# Altium PCB PCB1.PcbDoc
Units mil, origin at the board's own origin, x right, y up, seen from the top; angles counter-clockwise.
Board outline 6000 x 4000 mil, 2 copper layers (Top Layer, Bottom Layer); 21 components, 20 nets, 386 pads, 0 vias.
Unrouted connection lines stored in the file: 85.
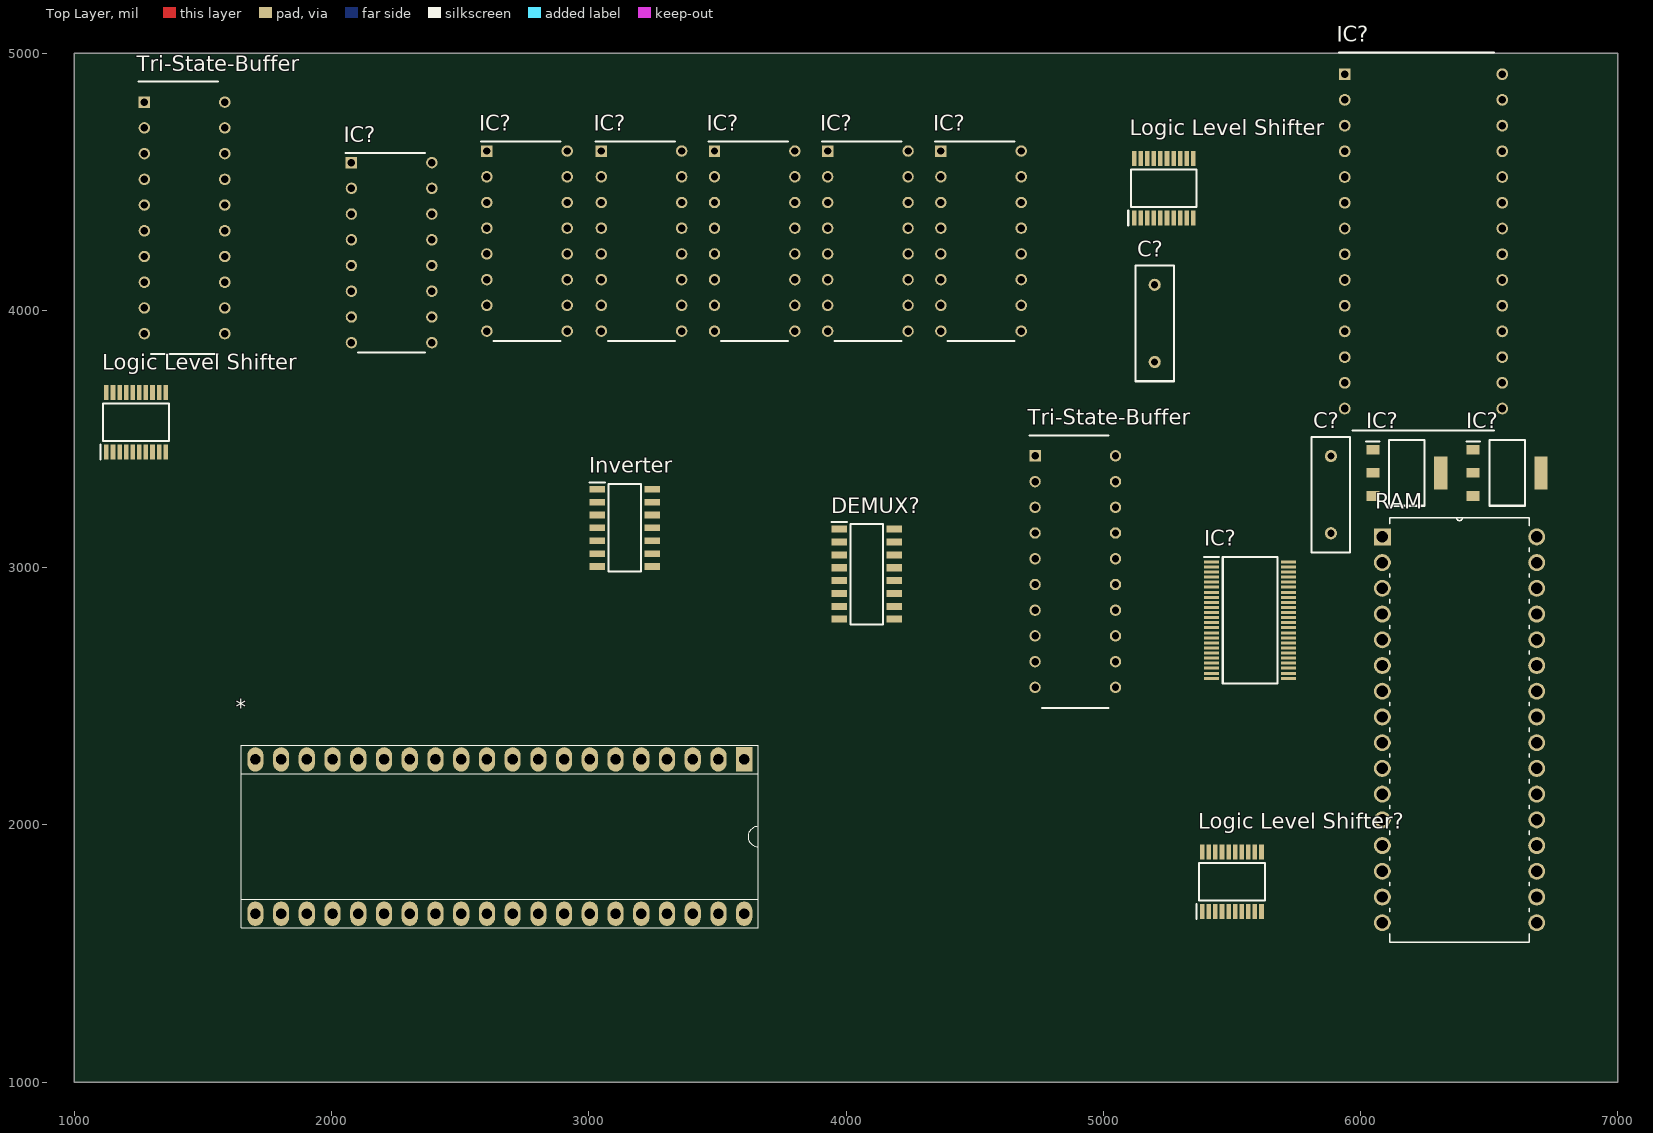
[diagram p0: Top Layer view]
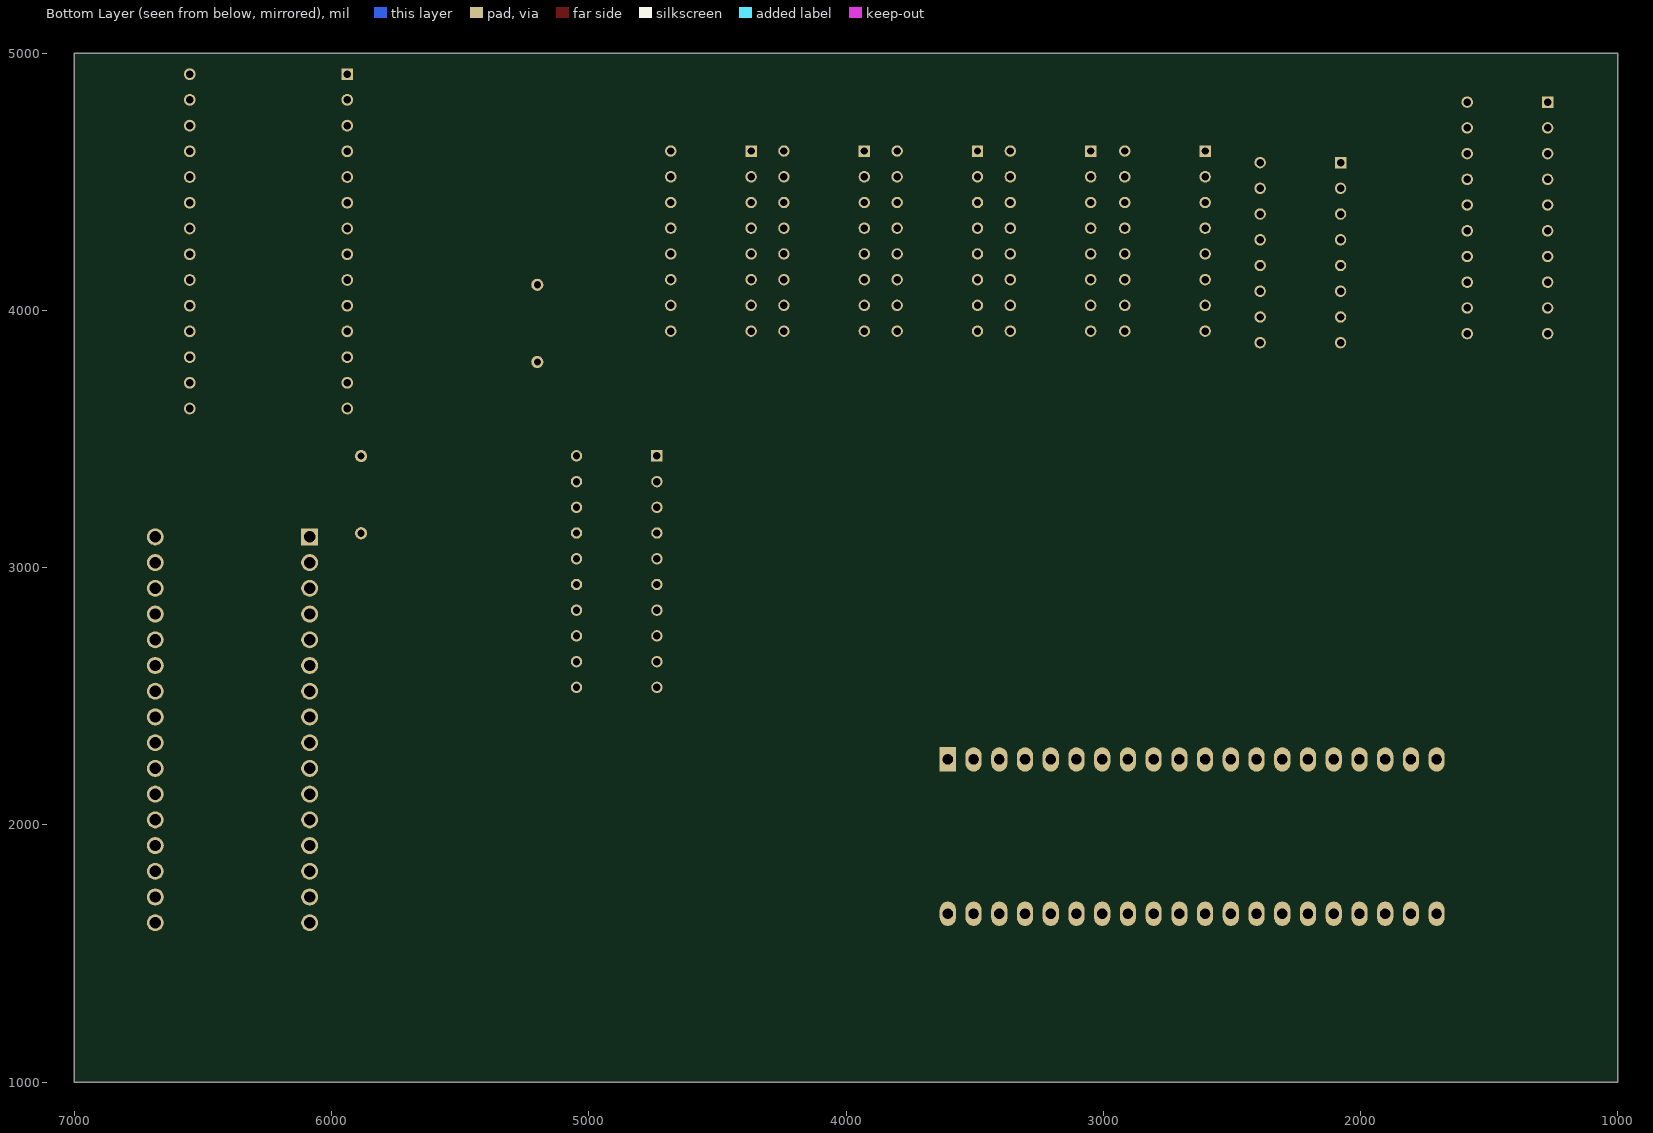
[diagram p1: Bottom Layer view, seen from below]

## Layer stack, top to bottom
Top Solder: solder mask 0.4, Solder Resist, Dk 3.5
Top Layer: signal copper 1.4
Dielectric 1: dielectric 12.6, FR-4, Dk 4.8
Bottom Layer: signal copper 1.4
Bottom Solder: solder mask 0.4, Solder Resist, Dk 3.5

## Board outline
1000,1000 7000,1000 7000,5000 1000,5000

## Design rules (kind name [scope] priority, off if disabled: settings)
Clearance [All] p1: gap=10 ignorepadtopadclearanceinfootprint=FALSE except(0: Arc-Hole Track-Hole SMDPad-Hole THPad-Hole Via-Hole Fill-Hole Poly-Hole Region-Hole Text-Hole)
PolygonConnect [All] p1: connectstyle=Relief reliefconductorwidth=10 reliefentries=4 polygonreliefangle="90 Angle" airgapwidth=10
RoutingVias [All] p1: holewidth=28 width=50 viastyle="Through Hole" minholewidth=28 minwidth=50 maxholewidth=28 maxwidth=50
SolderMaskExpansion [All] p1: expansion=4 istentingtop=FALSE
Width [All] p1: maxlimit=10 minlimit=10 preferedwidth=10
30 further rules are at their usual default settings.

## Classes and differential pairs
component class Sheet1: * C? DEMUX? IC? Inverter "Logic Level Shifter" "Logic Level Shifter?" RAM Tri-State-Buffer

## Components (designator, comment, footprint, x,y, rotation, side; value= is the part's Value field where it differs from the comment)
* "CPU" Processor 2670,1935 r270 top
C? "Cap" RAD-0.3 5200,3950 r90 top value=100pF
C? "Cap" RAD-0.3 5885,3284.06 r90 top value=100pF
DEMUX? "74HC138S16-13" SOIC127P600X175-16N 4080,2975 r0 top
IC? "MC74LCX16244DTG" SOP50P810X110-48N 5570.87,2796.42 r0 top
IC? "SN74LS173" DIP794W53P254L1930H508Q16N 3645,4270 r0 top
IC? "SN74LS173" DIP794W53P254L1930H508Q16N 4525,4270 r0 top
IC? "AT28C64B-15PU" DIP1556W56P254L3702H483Q28N 6245,4268.84 r0 top
IC? "SN74LS173" DIP794W53P254L1930H508Q16N 2233.7,4225 r0 top
IC? "SN74LS173" DIP794W53P254L1930H508Q16N 2760,4270 r0 top
IC? "SN74LS173" DIP794W53P254L1930H508Q16N 3205,4270 r0 top
IC? "AMS1117-3.3" SOT229P700X180-4N 6570,3369.06 r0 top
IC? "SN74LS173" DIP794W53P254L1930H508Q16N 4085,4270 r0 top
IC? "AMS1117-3.3" SOT229P700X180-4N 6180,3369.06 r0 top
Inverter "SN74HC04" SOIC127P600X175-14N 3140,3155 r0 top
"Logic Level Shifter" "TXB0108EPWR" SOP65P640X120-20N 1240,3565 r90 top
"Logic Level Shifter" "TXB0108EPWR" SOP65P640X120-20N 5235,4475 r90 top
"Logic Level Shifter?" "TXB0108EPWR" SOP65P640X120-20N 5500,1780 r90 top
RAM "AS6C1008" DIP254P1524X393-32 6685,1620 r0 top
Tri-State-Buffer "SN74LS245N" DIP794W53P254L2540H508Q20N 4891.3,2985 r0 top
Tri-State-Buffer "SN74LS245N" DIP794W53P254L2540H508Q20N 1428.7,4360 r0 top

## Footprints (in the part's own frame and the unit in brackets; to place one, negate y for a bottom-side part, rotate by r counter-clockwise, add the part's x,y. Pads: shape width x height; smd on the part's side, far side on the other; paste and mask are expansions set on the pad)
DIP254P1524X393-32 [mil]
  rect 66x66 hole 44: 1(-600,1500)
  round 66 hole 44: 2(-600,1400) 3(-600,1300) 4(-600,1200) 5(-600,1100) 6(-600,1000) 7(-600,900) 8(-600,800) 9(-600,700) 10(-600,600) 11(-600,500) 12(-600,400) 13(-600,300) 14(-600,200) 15(-600,100) 16(-600,0) 17(0,0) 18(0,100) 19(0,200) 20(0,300) 21(0,400) 22(0,500) 23(0,600) 24(0,700) 25(0,800) 26(0,900) 27(0,1000) 28(0,1100) 29(0,1200) 30(0,1300) 31(0,1400) 32(0,1500)
  silkscreen extent -572,-75 -28,1575
DIP794W53P254L1930H508Q16N [mm]
  rect 1.13x1.13 hole 0.73: 1(-3.97,8.89)
  round 1.13 hole 0.73: 2(-3.97,6.35) 3(-3.97,3.81) 4(-3.97,1.27) 5(-3.97,-1.27) 6(-3.97,-3.81) 7(-3.97,-6.35) 8(-3.97,-8.89) 9(3.97,-8.89) 10(3.97,-6.35) 11(3.97,-3.81) 12(3.97,-1.27) 13(3.97,1.27) 14(3.97,3.81) 15(3.97,6.35) 16(3.97,8.89)
  silkscreen extent -4.53,-9.84 3.3,9.84, body extent -4.1,-9.65 4.1,9.65, height 5.08
DIP794W53P254L2540H508Q20N [mm]
  rect 1.13x1.13 hole 0.73: 1(-3.97,11.43)
  round 1.13 hole 0.73: 2(-3.97,8.89) 3(-3.97,6.35) 4(-3.97,3.81) 5(-3.97,1.27) 6(-3.97,-1.27) 7(-3.97,-3.81) 8(-3.97,-6.35) 9(-3.97,-8.89) 10(-3.97,-11.43) 11(3.97,-11.43) 12(3.97,-8.89) 13(3.97,-6.35) 14(3.97,-3.81) 15(3.97,-1.27) 16(3.97,1.27) 17(3.97,3.81) 18(3.97,6.35) 19(3.97,8.89) 20(3.97,11.43)
  silkscreen extent -4.53,-13.46 3.3,13.46, body extent -4.1,-12.7 4.1,12.7, height 5.08
DIP1556W56P254L3702H483Q28N [mil]
  rect 45.63x45.63 hole 29.88: 1(-306.26,650)
  round 45.63 hole 29.88: 2(-306.26,550) 3(-306.26,450) 4(-306.26,350) 5(-306.26,250) 6(-306.26,150) 7(-306.26,50) 8(-306.26,-50) 9(-306.26,-150) 10(-306.26,-250) 11(-306.26,-350) 12(-306.26,-450) 13(-306.26,-550) 14(-306.26,-650) 15(306.26,-650) 16(306.26,-550) 17(306.26,-450) 18(306.26,-350) 19(306.26,-250) 20(306.26,-150) 21(306.26,-50) 22(306.26,50) 23(306.26,150) 24(306.26,250) 25(306.26,350) 26(306.26,450) 27(306.26,550) 28(306.26,650)
  silkscreen extent -329,-735 275,735, body extent -312,-729 312,729, height 190
Processor [mm]
  rect 2.4x1.6 hole 1 slot 1.005 at 0 deg: 1(-8.128,23.725)
  oval 2.4x1.6 hole 1 slot 1.005 at 0 deg: 2(-8.128,21.185) 3(-8.128,18.645) 4(-8.128,16.105) 5(-8.128,13.565) 6(-8.128,11.025) 7(-8.128,8.485) 8(-8.128,5.945) 9(-8.128,3.405) 10(-8.128,0.865) 11(-8.128,-1.675) 12(-8.128,-4.215) 13(-8.128,-6.755) 14(-8.128,-9.295) 15(-8.128,-11.835) 16(-8.128,-14.375) 17(-8.128,-16.915) 18(-8.128,-19.455) 19(-8.128,-21.995) 20(-8.128,-24.535) 21(7.112,-24.535) 22(7.112,-21.995) 23(7.112,-19.455) 24(7.112,-16.915) 25(7.112,-14.375) 26(7.112,-11.835) 27(7.112,-9.295) 28(7.112,-6.755) 29(7.112,-4.215) 30(7.112,-1.675) 31(7.112,0.865) 32(7.112,3.405) 33(7.112,5.945) 34(7.112,8.485) 35(7.112,11.025) 36(7.112,13.565) 37(7.112,16.105) 38(7.112,18.645) 39(7.112,21.185) 40(7.112,23.725)
  silkscreen extent -9.52,-25.92 8.5,25.12, body extent -8.12,-26.75 7.37,25.65, height 5
RAD-0.3 [mm] "Radial Cap, Thru-Hole; 2 Leads; 0.3 in Pin Spacing"
  round 1.2 hole 0.7: 1(-3.81,0) 2(3.81,0)
  silkscreen extent -5.71,-1.91 5.71,1.91
SOIC127P600X175-14N [mm]
  rect 1.55x0.65 smd: 1(-2.725,3.81) 2(-2.725,2.54) 3(-2.725,1.27) 4(-2.725,0) 5(-2.725,-1.27) 6(-2.725,-2.54) 7(-2.725,-3.81) 8(2.725,-3.81) 9(2.725,-2.54) 10(2.725,-1.27) 11(2.725,0) 12(2.725,1.27) 13(2.725,2.54) 14(2.725,3.81)
  silkscreen extent -3.5,-4.33 1.6,4.48, body extent -3,-4.33 3,4.33, height 1.75
SOIC127P600X175-16N [mm]
  rect 1.525x0.7 smd: 1(-2.712,4.445) 2(-2.712,3.175) 3(-2.712,1.905) 4(-2.712,0.635) 5(-2.712,-0.635) 6(-2.712,-1.905) 7(-2.712,-3.175) 8(-2.712,-4.445) 9(2.712,-4.445) 10(2.712,-3.175) 11(2.712,-1.905) 12(2.712,-0.635) 13(2.712,0.635) 14(2.712,1.905) 15(2.712,3.175) 16(2.712,4.445)
  silkscreen extent -3.47,-4.95 1.6,5.15, body extent -3,-4.95 3,4.95, height 1.75
SOP50P810X110-48N [mm]
  rect 1.475x0.3 smd: 1(-3.788,5.75) 2(-3.788,5.25) 3(-3.788,4.75) 4(-3.788,4.25) 5(-3.788,3.75) 6(-3.788,3.25) 7(-3.788,2.75) 8(-3.788,2.25) 9(-3.788,1.75) 10(-3.788,1.25) 11(-3.788,0.75) 12(-3.788,0.25) 13(-3.788,-0.25) 14(-3.788,-0.75) 15(-3.788,-1.25) 16(-3.788,-1.75) 17(-3.788,-2.25) 18(-3.788,-2.75) 19(-3.788,-3.25) 20(-3.788,-3.75) 21(-3.788,-4.25) 22(-3.788,-4.75) 23(-3.788,-5.25) 24(-3.788,-5.75) 25(3.788,-5.75) 26(3.788,-5.25) 27(3.788,-4.75) 28(3.788,-4.25) 29(3.788,-3.75) 30(3.788,-3.25) 31(3.788,-2.75) 32(3.788,-2.25) 33(3.788,-1.75) 34(3.788,-1.25) 35(3.788,-0.75) 36(3.788,-0.25) 37(3.788,0.25) 38(3.788,0.75) 39(3.788,1.25) 40(3.788,1.75) 41(3.788,2.25) 42(3.788,2.75) 43(3.788,3.25) 44(3.788,3.75) 45(3.788,4.25) 46(3.788,4.75) 47(3.788,5.25) 48(3.788,5.75)
  silkscreen extent -4.52,-6.25 2.7,6.25, body extent -4.05,-6.25 4.05,6.25, height 1.1
SOP65P640X120-20N [mm]
  rect 1.475x0.45 smd: 1(-2.938,2.925) 2(-2.938,2.275) 3(-2.938,1.625) 4(-2.938,0.975) 5(-2.938,0.325) 6(-2.938,-0.325) 7(-2.938,-0.975) 8(-2.938,-1.625) 9(-2.938,-2.275) 10(-2.938,-2.925) 11(2.938,-2.925) 12(2.938,-2.275) 13(2.938,-1.625) 14(2.938,-0.975) 15(2.938,-0.325) 16(2.938,0.325) 17(2.938,0.975) 18(2.938,1.625) 19(2.938,2.275) 20(2.938,2.925)
  silkscreen extent -3.67,-3.25 1.85,3.5, body extent -3.2,-3.25 3.2,3.25, height 1.2
SOT229P700X180-4N [mm]
  rect 1.3x0.95 smd: 1(-3.35,2.29) 2(-3.35,0) 3(-3.35,-2.29)
  rect 1.3x3.25 smd: 4(3.35,0)
  silkscreen extent -4,-3.25 1.75,3.25, body extent -3.5,-3.25 3.5,3.25, height 1.8

## Part data
C? C?: "Capacitor", LatestRevisionDate=17-Jul-2002, LatestRevisionNote="Re-released for DXP Platform.", PackageDescription="Radial Cap, Thru-Hole; 2 Leads; 0.3 in Pin Spacing", PackageReference=RAD-0.3, Published=8-Jun-2000, Publisher="Altium Limited"
DEMUX?: "Integrated Circuit", Manufacturer_Name="Diodes Inc.", Mouser Part Number=621-74HC138S16-13, Arrow Part Number=74HC138S16-13, Arrow Price/Stock=https://www.arrow.com/en/products/74hc138s16-13/diodes-incorporated, Datasheet Link=https://www.diodes.com/assets/Datasheets/74HC138.pdf, Height=1.75mm, Manufacturer_Part_Number=74HC138S16-13, Mouser Price/Stock=https://www.mouser.com/Search/Refine.aspx?Keyword=621-74HC138S16-13
IC?: "Integrated Circuit", Manufacturer_Name="ON Semiconductor", Mouser Part Number=863-MC74LCX16244DTG, Arrow Part Number=MC74LCX16244DTG, Arrow Price/Stock=https://www.arrow.com/en/products/mc74lcx16244dtg/on-semiconductor, Datasheet Link=http://www.onsemi.com/pub/Collateral/MC74LCX16244-D.PDF, Height=1.1mm, Manufacturer_Part_Number=MC74LCX16244DTG, Mouser Price/Stock=https://www.mouser.com/Search/Refine.aspx?Keyword=863-MC74LCX16244DTG
IC? IC? IC? IC? IC? IC?: library part SN74LS173ANG4, "Integrated Circuit", Manufacturer_Name="Texas Instruments", Datasheet Link=http://www.ti.com/lit/ds/symlink/sn74ls173a.pdf, Height=5.08mm, Manufacturer_Part_Number=SN74LS173ANG4
IC?: "Integrated Circuit", Manufacturer_Name=Microchip, Mouser Part Number=556-AT28C64B15PU, Arrow Part Number=AT28C64B-15PU, Arrow Price/Stock=https://www.arrow.com/en/products/at28c64b-15pu/microchip-technology, Datasheet Link=http://www.atmel.com/images/doc0270.pdf, Height=4.826mm, Manufacturer_Part_Number=AT28C64B-15PU, Mouser Price/Stock=https://www.mouser.co.uk/ProductDetail/Microchip-Technology-Atmel/AT28C64B-15PU/?qs=2VKgqYuc3OvipbcAuBcLow%3D%3D
IC? IC?: "Integrated Circuit", Manufacturer_Name="Advanced Monolithic Systems", Datasheet Link=http://www.advanced-monolithic.com/pdf/ds1117.pdf, Height=1.8mm, Manufacturer_Part_Number=AMS1117-3.3
Inverter: library part SN74HC04D, "Integrated Circuit", Manufacturer_Name="Texas Instruments", Mouser Part Number=595-SN74HC04D, Arrow Part Number=SN74HC04D, Arrow Price/Stock=https://www.arrow.com/en/products/sn74hc04d/texas-instruments, Datasheet Link=http://www.ti.com/lit/ds/symlink/sn74hc04.pdf?HQS=TI-null-null-digikeymode-df-pf-null-wwe&ts=1590985263778, Height=1.75mm, Manufacturer_Part_Number=SN74HC04D, Mouser Price/Stock=https://www.mouser.co.uk/ProductDetail/Texas-Instruments/SN74HC04D/?qs=L5CvrNUdZiq5DddJvhoqZw%3D%3D
"Logic Level Shifter" "Logic Level Shifter" "Logic Level Shifter?": "Integrated Circuit", Manufacturer_Name="Texas Instruments", Datasheet Link=http://www.ti.com/lit/ds/symlink/txb0108.pdf, Height=1.2mm, Manufacturer_Part_Number=TXB0108EPWR
RAM: library part AS6C1008-55PCN, "Integrated Circuit", Manufacturer_Name="Alliance Memory", Mouser Part Number=913-AS6C1008-55PCN, Datasheet Link=http://componentsearchengine.com/Datasheets/1/AS6C1008-55PCN.pdf, Manufacturer_Part_Number=AS6C1008-55PCN, Mouser Price/Stock=https://www.mouser.co.uk/ProductDetail/Alliance-Memory/AS6C1008-55PCN?qs=E5c5%252Bmu3i39qb4Qta5D2qg%3D%3D
Tri-State-Buffer Tri-State-Buffer: "Integrated Circuit", Manufacturer_Name="Texas Instruments", Mouser Part Number=595-SN74LS245N, Arrow Part Number=SN74LS245N, Arrow Price/Stock=https://www.arrow.com/en/products/sn74ls245n/texas-instruments, Datasheet Link=http://componentsearchengine.com/Datasheets/1/SN74LS245N.pdf, Height=5.08mm, Manufacturer_Part_Number=SN74LS245N, Mouser Price/Stock=https://www.mouser.co.uk/ProductDetail/Texas-Instruments/SN74LS245N/?qs=tJ5HNKWh3OU3CUIGSPX6%2Fg%3D%3D

## Nets (pads, with @x,y where several pads share a name; then routed paths per layer and width w, separated by ;. In a path a pad name is that pad's centre, name@x,y a point inside that pad or via, vN(x,y) a via of type N, cw(c..) or ccw(c..) an arc to the next point about the centre after c; other vN are vias at no path point)
+3.3: "Logic Level Shifter.2" "Logic Level Shifter.10" "Logic Level Shifter?.2" "Logic Level Shifter?.10"
+5: "Logic Level Shifter.19" "Logic Level Shifter?.19" DEMUX?.6 DEMUX?.16 IC?.16@2390,4575 IC?.16@2916.3,4620 IC?.16@3361.3,4620 IC?.16@3801.3,4620 IC?.16@4241.3,4620 IC?.16@4681.3,4620 Inverter.14 RAM.31 RAM.32 Tri-State-Buffer.1@4735,3435 Tri-State-Buffer.20
GND: "Logic Level Shifter.11" "Logic Level Shifter?.11" C?.1 DEMUX?.3 DEMUX?.4 DEMUX?.5 DEMUX?.8 IC?.1@2077.4,4575 IC?.1@2603.7,4620 IC?.1@3048.7,4620 IC?.1@3488.7,4620 IC?.1@3928.7,4620 IC?.1@4368.7,4620 IC?.1@6048.11,3459.22 IC?.1@6438.11,3459.22 IC?.2@2077.4,4475 IC?.2@2603.7,4520 IC?.2@3048.7,4520 IC?.2@3488.7,4520 IC?.2@3928.7,4520 IC?.2@4368.7,4520 IC?.4@6311.89,3369.06 IC?.4@6701.89,3369.06 IC?.8@2077.4,3875 IC?.8@2603.7,3920 IC?.8@3048.7,3920 IC?.8@3488.7,3920 IC?.8@3928.7,3920 IC?.8@4368.7,3920 Inverter.7 RAM.16 Tri-State-Buffer.1@1272.4,4810 Tri-State-Buffer.10
NetC?_2: C?.2@5885,3434.06 IC?.2@6438.11,3369.06
NetDEMUX?_13: DEMUX?.13 Inverter.5
NetDEMUX?_14: DEMUX?.14 Inverter.3
NetDEMUX?_15: DEMUX?.15 Inverter.1
NetIC?_4: "Logic Level Shifter.20"@5119.84,4590.67 IC?.4@4368.7,4320
NetIC?_6: "Logic Level Shifter.18"@5171.02,4590.67 IC?.6@4368.7,4120
NetIC?_7: IC?.7@2077.4,3975 IC?.7@2603.7,4020 IC?.7@3048.7,4020 IC?.7@3488.7,4020 IC?.7@3928.7,4020 IC?.7@4368.7,4020 Inverter.10
NetIC?_9: IC?.9@2390,3875 IC?.9@2916.3,3920 IC?.10@2390,3975 IC?.10@2916.3,4020 Inverter.2
NetIC?_11: IC?.11@3361.3,4120 IC?.12@3361.3,4220 IC?.13@3361.3,4320
NetIC?_15: IC?.15@2390,4475 IC?.15@2916.3,4520 IC?.15@3361.3,4520 IC?.15@3801.3,4520 IC?.15@4241.3,4520 IC?.15@4681.3,4520
NetInverter_8: Inverter.8 Tri-State-Buffer.19@1585,4710
NetInverter_9: Inverter.9 Tri-State-Buffer.19@5047.6,3335
NetInverter_11: Inverter.11
"NetLogic Level Shifter_3": "Logic Level Shifter.3"@1176.02,3449.33 "Logic Level Shifter.4"@1201.61,3449.33
NetTri-State-Buffer_7: Tri-State-Buffer.7@1272.4,4210 Tri-State-Buffer.8@1272.4,4110
NetTri-State-Buffer_14: Tri-State-Buffer.14@5047.6,2835 Tri-State-Buffer.15@5047.6,2935
VCC: IC?.3@6048.11,3278.91 IC?.3@6438.11,3278.91
pads on no net: "Logic Level Shifter.1" "Logic Level Shifter.3"@5171.02,4359.33 "Logic Level Shifter.4"@5196.61,4359.33 "Logic Level Shifter.5" "Logic Level Shifter.6" "Logic Level Shifter.7" "Logic Level Shifter.8" "Logic Level Shifter.9" "Logic Level Shifter.12" "Logic Level Shifter.13" "Logic Level Shifter.14" "Logic Level Shifter.15" "Logic Level Shifter.16" "Logic Level Shifter.17" "Logic Level Shifter.18"@1176.02,3680.67 "Logic Level Shifter.20"@1124.84,3680.67 "Logic Level Shifter?.1" "Logic Level Shifter?.3" "Logic Level Shifter?.4" "Logic Level Shifter?.5" "Logic Level Shifter?.6" "Logic Level Shifter?.7" "Logic Level Shifter?.8" "Logic Level Shifter?.9" "Logic Level Shifter?.12" "Logic Level Shifter?.13" "Logic Level Shifter?.14" "Logic Level Shifter?.15" "Logic Level Shifter?.16" "Logic Level Shifter?.17" "Logic Level Shifter?.18" "Logic Level Shifter?.20" *.1 *.2 *.3 *.4 *.5 *.6 *.7 *.8 *.9 *.10 *.11 *.12 *.13 *.14 *.15 *.16 *.17 *.18 *.19 *.20 *.21 *.22 *.23 *.24 *.25 *.26 *.27 *.28 *.29 *.30 *.31 *.32 *.33 *.34 *.35 *.36 *.37 *.38 *.39 *.40 C?.2@5200,4100 DEMUX?.1 DEMUX?.2 DEMUX?.7 DEMUX?.9 DEMUX?.10 DEMUX?.11 DEMUX?.12 IC?.1@5421.73,3022.8 IC?.1@5938.74,4918.84 IC?.2@5421.73,3003.11 IC?.2@5938.74,4818.84 IC?.2@6048.11,3369.06 IC?.3@2077.4,4375 IC?.3@2603.7,4420 IC?.3@3048.7,4420 IC?.3@3488.7,4420 IC?.3@3928.7,4420 IC?.3@4368.7,4420 IC?.3@5421.73,2983.43 IC?.3@5938.74,4718.84 IC?.4@2077.4,4275 IC?.4@2603.7,4320 IC?.4@3048.7,4320 IC?.4@3488.7,4320 IC?.4@3928.7,4320 IC?.4@5421.73,2963.74 IC?.4@5938.74,4618.84 IC?.5 IC?.6@2077.4,4075 IC?.6@2603.7,4120 IC?.6@3048.7,4120 IC?.6@3488.7,4120 IC?.6@3928.7,4120 IC?.6@5421.73,2924.37 IC?.6@5938.74,4418.84 IC?.7@5421.73,2904.68 IC?.7@5938.74,4318.84 IC?.8@5421.73,2885 IC?.8@5938.74,4218.84 IC?.9@3361.3,3920 IC?.9@3801.3,3920 IC?.9@4241.3,3920 IC?.9@4681.3,3920 IC?.9@5421.73,2865.31 IC?.9@5938.74,4118.84 IC?.10@3361.3,4020 IC?.10@3801.3,4020 IC?.10@4241.3,4020 IC?.10@4681.3,4020 IC?.10@5421.73,2845.63 IC?.10@5938.74,4018.84 IC?.11@2390,4075 IC?.11@2916.3,4120 IC?.11@3801.3,4120 IC?.11@4241.3,4120 IC?.11@4681.3,4120 IC?.11@5421.73,2825.94 IC?.11@5938.74,3918.84 IC?.12@2390,4175 IC?.12@2916.3,4220 IC?.12@3801.3,4220 IC?.12@4241.3,4220 IC?.12@4681.3,4220 IC?.12@5421.73,2806.26 IC?.12@5938.74,3818.84 IC?.13@2390,4275 IC?.13@2916.3,4320 IC?.13@3801.3,4320 IC?.13@4241.3,4320 IC?.13@4681.3,4320 IC?.13@5421.73,2786.57 IC?.13@5938.74,3718.84 IC?.14 IC?.15@5421.73,2747.2 IC?.15@6551.26,3618.84 IC?.16@5421.73,2727.52 IC?.16@6551.26,3718.84 IC?.17 IC?.18 IC?.19 IC?.20 IC?.21 IC?.22 IC?.23 IC?.24 IC?.25 IC?.26 IC?.27 IC?.28 IC?.29 IC?.30 IC?.31 IC?.32 IC?.33 IC?.34 IC?.35 IC?.36 IC?.37 IC?.38 IC?.39 IC?.40 IC?.41 IC?.42 IC?.43 IC?.44 IC?.45 IC?.46 IC?.47 IC?.48 Inverter.4 Inverter.6 Inverter.12 Inverter.13 RAM.1 RAM.2 RAM.3 RAM.4 RAM.5 RAM.6 RAM.7 RAM.8 RAM.9 RAM.10 RAM.11 RAM.12 RAM.13 RAM.14 RAM.15 RAM.17 RAM.18 RAM.19 RAM.20 RAM.21 RAM.22 RAM.23 RAM.24 RAM.25 RAM.26 RAM.27 RAM.28 RAM.29 RAM.30 Tri-State-Buffer.2 Tri-State-Buffer.3 Tri-State-Buffer.4 Tri-State-Buffer.5 Tri-State-Buffer.6 Tri-State-Buffer.7@4735,2835 Tri-State-Buffer.8@4735,2735 Tri-State-Buffer.9 Tri-State-Buffer.11 Tri-State-Buffer.12 Tri-State-Buffer.13 Tri-State-Buffer.14@1585,4210 Tri-State-Buffer.15@1585,4310 Tri-State-Buffer.16 Tri-State-Buffer.17 Tri-State-Buffer.18